# Altium PCB LedMatrixDisplay.PCBDOC (part 2 of 3)
Units mm, origin at the board's own origin, x right, y up, seen from the top; angles counter-clockwise.
Board outline 305.05 x 54.1 mm, 4 copper layers (Top Layer, POWER, GROUND, Bottom Layer); 103 components, 165 nets, 805 pads, 317 vias.
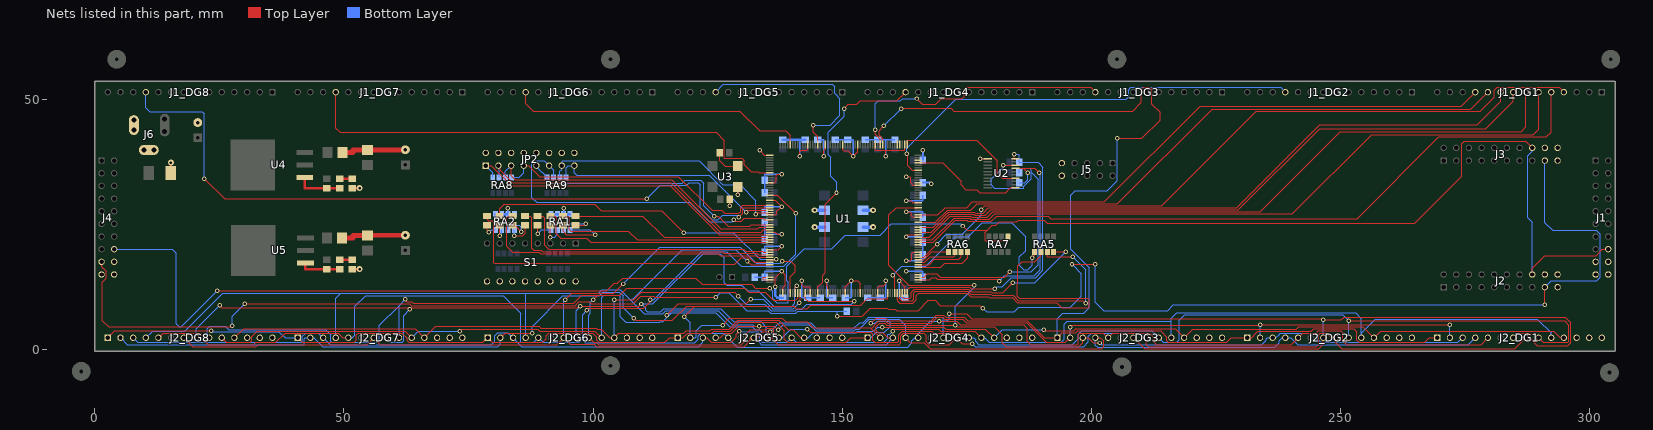
[diagram p4: the nets of this part, all layers, seen from the top]

## Via types
v1: diameter 0.9, hole 0.5, Top Layer to Bottom Layer, 307 vias
v2: diameter 1.2, hole 0.5, Top Layer to Bottom Layer, 9 vias
v3: diameter 1.27, hole 0.711, Top Layer to Bottom Layer, 1 vias

## Nets (pads, with @x,y where several pads share a name; then routed paths per layer and width w, separated by ;. In a path a pad name is that pad's centre, name@x,y a point inside that pad or via, vN(x,y) a via of type N, cw(c..) or ccw(c..) an arc to the next point about the centre after c; other vN are vias at no path point) (continued)
CNT16: J1.16 J2.16 J3.16 J4.16 RA7.1 | length 382.3
  Top Layer w0.2: v1(24.588,11.684) 102.718,11.684 104.242,13.208 104.902,13.208 105.969,14.275 120.65,14.275 121.92,13.005 131.826,13.005 132.309,12.522 132.309,12.446 132.512,12.243 v1(135.459,12.243) ; v1(174.219,24.714) 175.057,23.876 179.096,23.876 ; RA7.1@183.262,22.657 183.262,21.996 183.008,21.742 178.639,21.742 178.639,23.317 178.588,23.368 180.061,24.841 180.798,24.841 181.509,25.552 184.989,25.552 185.319,25.883 190.475,25.883 191.085,25.273 264.872,25.273 274.32,34.722 274.32,41.25 274.803,41.732 287.071,41.732 J3.16@288.417,40.386 ; J2.16@288.417,14.986 288.417,16.256 290.957,18.796 301.219,18.796 302.387,19.964 302.387,20.066 J1.16@303.657,20.066
  Bottom Layer w0.2: J4.16@3.937,20.066 15.571,20.066 16.383,19.253 16.383,5.105 16.968,4.521 17.425,4.521 v1(24.588,11.684) ; v1(135.459,12.243) 136.043,11.659 136.043,10.211 136.906,9.347 139.142,9.347 139.142,13.462 138.837,13.767 138.837,16.662 142.342,20.168 147.879,20.168 150.597,22.885 157.582,22.885 159.817,25.121 173.813,25.121 v1(174.219,24.714) ; J2.16@288.417,14.986 288.417,25.476 287.478,26.416 287.478,38.786 288.417,39.726 J3.16@288.417,40.386
CNT17: J2.17 J3.17 J4.17 R12.2 | length 382.4
  Top Layer w0.2: J4.17@1.397,17.526 1.397,16.51 1.651,16.256 1.702,16.256 2.337,15.621 2.337,14.224 1.575,13.462 1.575,5.74 2.845,4.47 27.432,4.47 v1(27.661,4.699) ; v1(30.125,9.093) 63.221,9.093 63.551,8.763 96.419,8.763 97.13,9.474 99.264,9.474 99.594,9.144 108.077,9.144 109.601,10.668 112.141,10.668 112.395,10.414 v1(124.587,10.414) ; v1(148.971,6.604) 153.999,6.604 155.65,8.255 159.073,8.255 159.327,8.001 160.655,8.001 160.909,7.747 165.227,7.747 167.259,9.779 168.656,9.779 169.672,8.763 177.673,8.763 v1(178.181,8.255) ; v1(196.088,17.018) v1(200.787,17.018) ; v1(290.957,8.89) J2.17@290.957,12.446
  Bottom Layer w0.2: v1(27.661,4.699) 27.661,6.629 v1(30.125,9.093) ; v1(124.587,10.414) 125.476,11.303 127.254,11.303 130.81,7.747 135.103,7.747 135.611,7.239 140.64,7.239 141.021,7.62 R12.2@150.942,7.62 ; v1(148.971,6.604) 148.971,7.62 ; v1(178.181,8.255) 178.943,7.493 184.531,7.493 185.42,8.382 195.707,8.382 197.993,10.668 197.993,15.113 v1(196.088,17.018) ; v1(200.787,17.018) 200.787,9.398 202.438,7.747 215.265,7.747 216.408,8.89 v1(290.957,8.89) ; J2.17@290.957,12.446 292.227,13.716 301.371,13.716 302.057,14.402 302.057,23.038 301.219,23.876 292.481,23.876 290.957,25.4 J3.17@290.957,37.846
DATA0: RA5.5 U1.99 | length 48.5
  Top Layer w0.2: v1(160.097,14.808) 160.577,14.327 U1.99@160.577,11.273 ; v1(188.113,18.351) 188.596,18.834 RA5.5@188.596,19.507
  Bottom Layer w0.2: v1(160.097,14.808) 161.951,16.662 166.726,16.662 172.67,22.606 175.286,22.606 178.08,25.4 183.961,25.4 186.767,22.594 186.767,19.768 185.497,18.498 185.497,16.815 186.411,15.9 187.212,15.9 188.113,16.801 v1(188.113,18.351)
DATA1: RA5.6 U1.100 | length 71.4
  Top Layer w0.2: U1.100@161.077,11.273 161.077,10.135 161.163,10.049 161.163,9.601 161.519,9.246 164.186,9.246 164.846,9.906 164.846,10.795 165.303,11.252 175.036,11.252 175.747,10.541 179.324,10.541 179.578,10.287 184.194,10.287 185.134,9.347 193.015,9.347 194.031,8.331 199.34,8.331 199.594,8.585 199.594,9.804 199.213,10.185 185.522,10.185 185.09,10.617 185.09,13.056 185.217,13.183 185.217,16.713 186.081,17.577 188.646,17.577 189.866,18.796 RA5.6@189.866,19.507
DATA2: RA5.7 U1.101 | length 57.6
  Top Layer w0.2: U1.101@161.577,11.273 161.577,10.084 161.933,9.728 164.008,9.728 164.338,10.058 164.338,11.303 164.687,11.652 175.202,11.652 175.805,11.049 179.8,11.049 180.054,10.795 184.252,10.795 185.293,9.754 198.247,9.754 v1(198.832,9.169) ; RA5.7@191.136,19.507 191.136,18.593 v1(196.215,18.593)
  Bottom Layer w0.2: v1(196.215,18.593) 198.832,15.977 v1(198.832,9.169)
DATA3: RA5.8 U1.102 | length 41.1
  Top Layer w0.2: U1.102@162.077,11.273 162.077,10.414 162.306,10.185 163.551,10.185 163.803,10.438 163.803,11.403 164.452,12.052 175.367,12.052 175.863,11.557 179.858,11.557 180.086,11.328 182.195,11.328 v1(184.176,13.31) ; RA5.8@192.406,19.507 v1(194.818,19.507)
  Bottom Layer w0.2: v1(184.176,13.31) 188.621,13.31 v1(194.818,19.507)
DATA4: RA6.5 U1.114 | length 6.8
  Top Layer w0.2: U1.114@165.227,17.923 166.387,17.923 167.971,19.507 RA6.5@171.324,19.507
DATA5: RA6.6 U1.113 | length 8.7
  Top Layer w0.2: U1.113@165.227,17.423 166.522,17.423 167.64,18.542 172.391,18.542 172.594,18.745 RA6.6@172.594,19.507
DATA6: RA6.7 U1.112 | length 10.3
  Top Layer w0.2: U1.112@165.227,16.923 167.412,16.923 168.497,18.009 173.33,18.009 173.864,18.542 RA6.7@173.864,19.507
DATA7: RA6.8 U1.111 | length 11.9
  Top Layer w0.2: U1.111@165.227,16.423 169.749,16.423 170.597,17.272 174.067,17.272 175.134,18.339 RA6.8@175.134,19.507
DIN: U1.153 U2.1 | length 22.8
  Top Layer w0.2: U1.153@165.227,37.423 170.12,37.423 173.845,33.699 173.845,32.969 174.785,32.029 177.013,32.029 177.623,31.42 182.753,31.42 183.711,32.377 U2.1@184.758,32.377
DONE: R4.2 U1.104 U2.10 | length 59.2
  Top Layer w0.2: U1.104@163.077,11.273 163.077,11.938 163.592,12.452 175.533,12.452 175.895,12.09 v1(180.62,12.09) ; v1(184.481,39.065) 184.481,38.227 U2.10@184.758,38.227
  Bottom Layer w0.2: v1(180.62,12.09) 181.026,12.497 182.068,12.497 183.896,14.326 188.773,14.326 190.246,15.799 190.246,36.525 189.307,37.465 R4.2@185.481,37.465 185.481,38.862 185.278,39.065 v1(184.481,39.065)
ENABLE0: J1_DG1.11 U1.132 | length 122
  Top Layer w0.2: U1.132@165.227,26.923 169.164,26.923 170.638,28.397 174.93,28.397 176.073,29.54 202.565,29.54 221.793,48.768 274.193,48.768 J1_DG1.11@276.987,51.562
ENABLE1: J1_DG2.11 U1.150 | length 88.3
  Top Layer w0.2: v1(162.941,39.218) 163.17,38.989 163.17,36.805 164.051,35.923 U1.150@165.227,35.923
  Bottom Layer w0.2: v1(162.941,39.218) 162.941,40.335 172.797,50.19 207.01,50.19 207.468,50.648 207.468,52.07 207.899,52.502 237.948,52.502 J1_DG2.11@238.887,51.562
ENABLE2: J1_DG3.11 U1.168 | length 56.3
  Top Layer w0.2: v1(156.591,44.018) 156.591,43.15 157.577,42.164 U1.168@157.577,41.073 ; v1(164.897,50.292) 166.091,49.098 168.733,49.098 169.85,50.216 174.016,50.216 174.448,50.648 174.448,52.07 174.879,52.502 199.848,52.502 J1_DG3.11@200.787,51.562
  Bottom Layer w0.2: v1(156.591,44.018) 156.591,49.251 157.201,49.86 161.671,49.86 162.103,50.292 v1(164.897,50.292)
ENABLE3: J1_DG4.11 U1.68 | length 54.2
  Top Layer w0.2: U1.68@145.077,11.273 145.077,12.489 146.05,13.462 146.05,14.859 146.558,15.367 146.558,29.083 v1(148.844,31.369) ; v1(150.368,48.26) 151.206,49.098 152.908,49.098 153.645,49.835 160.96,49.835 J1_DG4.11@162.687,51.562
  Bottom Layer w0.2: v1(148.844,31.369) 148.844,33.528 147.701,34.671 147.701,38.481 147.193,38.989 147.193,43.561 150.368,46.736 v1(150.368,48.26)
ENABLE4: J1_DG5.11 U1.193 | length 41.3
  Top Layer w0.2: v1(144.145,44.958) 144.145,43.561 145.077,42.629 U1.193@145.077,41.073
  Bottom Layer w0.2: J1_DG5.11@124.587,51.562 126.137,53.111 148.006,53.111 148.463,52.654 148.463,51.308 149.505,50.267 149.505,46.889 147.574,44.958 v1(144.145,44.958)
ENABLE5: J1_DG6.11 U1.204 | length 59.9
  Top Layer w0.2: J1_DG6.11@86.487,51.562 86.487,49.225 87.961,47.752 129.464,47.752 133.408,43.808 138.695,43.808 139.577,42.926 U1.204@139.577,41.073
ENABLE6: J1_DG7.11 U1.8 | length 100.5
  Top Layer w0.2: J1_DG7.11@48.387,51.562 48.387,44.348 49.251,43.485 124.74,43.485 126.365,41.859 126.365,38.303 129.896,38.303 130.353,37.846 130.353,37.008 131.75,35.611 133.188,35.611 133.376,35.423 U1.8@135.427,35.423
ENABLE7: J1_DG8.11 U1.22 | length 152.5
  Top Layer w0.2: v1(22.022,34.214) 26.086,30.15 110.77,30.15 v1(110.821,30.201) ; v1(129.236,26.467) 129.998,27.229 129.998,28.27 130.151,28.423 U1.22@135.427,28.423
  Bottom Layer w0.2: J1_DG8.11@10.287,51.562 10.287,48.412 11.1,47.6 21.616,47.6 22.022,47.193 v1(22.022,34.214) ; v1(110.821,30.201) 113.462,32.842 118.771,32.842 119.304,33.376 121.108,33.376 121.514,32.969 121.514,28.372 123.952,25.933 125.07,25.933 125.984,26.848 128.855,26.848 v1(129.236,26.467)
FPGA_C\S\: U1.160
FPGA_D1: U1.145
FPGA_D4: U1.126
FPGA_D5: U1.120
FPGA_D6: U1.116
FPGA_D7: U1.108
"FPGA_DOUT_ BUSY": U1.154
FPGA_TDO-TDI: U1.157 U2.4 | length 27.2
  Top Layer w0.2: U1.157@163.077,41.073 163.077,41.961 176.962,41.961 181.077,37.846 181.077,35.394 182.144,34.327 U2.4@184.758,34.327
FPGA_W\R\I\T\E\: U1.161
GND: C1.2 C2.2 C3.2 C4.2 C5.1 C6.1 C7.1 C8.1 C9.1 C10.1 C11.1 C12.1 C13.1 C14.1 C15.1 C16.1 C17.1 C18.1 C19.2 C20.2 C21.2 C22.2 C23.2 C24.2 C25.2 C26.2 C27.2 C28.2 C29.2 C30.2 C31.2 C32.2 C34.1 C35.1 C36.1 C37.2 C38.2 C39.2 C40.2 C41.2 C42.2 C43.2 C44.2 D1.1 J1.17 J1.18 J1.19 J1.20 J2.18 J2.19 J2.20 J2_DG1.12 J2_DG1.13 J2_DG1.14 J2_DG2.12 J2_DG2.13 J2_DG2.14 J2_DG3.12 J2_DG3.13 J2_DG3.14 J2_DG4.12 J2_DG4.13 J2_DG4.14 J2_DG5.12 J2_DG5.13 J2_DG5.14 J2_DG6.12 J2_DG6.13 J2_DG6.14 J2_DG7.12 J2_DG7.13 J2_DG7.14 J2_DG8.12 J2_DG8.13 J2_DG8.14 J3.18 J3.19 J3.20 J4.18 J4.19 J4.20 J5.9 J5.10 J6.2 J6.2A J6.2B J6.3 J6.3A J6.3B JP2.2 JP2.4 JP2.6 JP2.8 JP2.10 JP2.12 JP2.14 JP2.16 R1.1 R9.1 R11.2 RA1.5 RA1.6 RA1.7 RA1.8 RA2.5 RA2.6 RA2.7 RA2.8 S1.9 S1.10 S1.11 S1.12 S1.13 S1.14 S1.15 S1.16 U1.1 U1.12 U1.19 U1.25 U1.32 U1.39 U1.50 U1.51 U1.54 U1.65 U1.72 U1.79 U1.85 U1.92 U1.103 U1.117 U1.124 U1.131 U1.137 U1.144 U1.158 U1.170 U1.177 U1.183 U1.190 U1.197 U2.11 U3.2 | length 260.8
  Top Layer w0.2: v1(133.411,39.878) 134.366,38.923 U1.1@135.427,38.923 ; U1.50@135.427,14.423 134.112,14.423 134.112,13.923 U1.51@135.427,13.923 136.479,13.923 136.602,14.046 ; U1.39@135.427,19.923 137.158,19.923 v1(137.84,20.606) ; U1.32@135.427,23.423 136.597,23.423 136.914,23.106 v1(137.84,23.106) ; U1.25@135.427,26.923 136.652,26.923 136.906,27.178 136.906,27.672 v1(137.84,28.606) 136.523,29.923 U1.19@135.427,29.923 ; U1.12@135.427,33.423 136.421,33.423 136.779,33.782 136.779,34.925 136.96,35.106 v1(137.84,35.106) ; v1(136.602,12.497) 136.602,14.046 ; 137.5,15.265 136.602,14.367 136.602,14.046 ; v1(137.84,15.606) 138.608,14.838 138.608,12.802 138.077,12.271 U1.54@138.077,11.273 ; v1(141.439,38.674) 141.439,39.584 141.732,39.878 142.875,39.878 143.077,40.08 U1.197@143.077,41.073 ; v1(141.895,13.686) 141.895,12.919 142.24,12.573 143.383,12.573 143.577,12.379 U1.65@143.577,11.273 ; v1(146.26,38.66) 146.26,39.834 146.577,40.151 U1.190@146.577,41.073 ; v1(146.895,13.686) 146.895,12.745 147.077,12.562 U1.72@147.077,11.273 ; U1.183@150.077,41.073 150.077,40.042 150.338,39.781 151.079,39.781 v1(152.186,38.674) 153.077,39.565 U1.177@153.077,41.073 ; U1.79@150.577,11.273 150.577,12.504 v1(151.76,13.686) 153.065,13.686 153.577,13.174 U1.85@153.577,11.273 ; U1.170@156.577,41.073 156.577,39.878 158.75,39.878 ; U1.92@157.077,11.273 157.077,12.297 157.48,12.7 158.369,12.7 158.75,13.081 v1(158.75,13.718) ; v1(158.75,38.66) 158.75,39.878 ; v1(161.395,13.686) 162.577,12.504 U1.103@162.577,11.273 ; U1.158@162.577,41.073 162.577,39.878 158.75,39.878 ; v1(162.814,17.741) 163.664,17.741 163.957,18.034 163.957,19.177 164.204,19.423 U1.117@165.227,19.423 ; v1(162.814,22.606) 163.132,22.923 U1.124@165.227,22.923 ; v1(162.814,27.606) 163.529,27.606 163.83,27.305 163.83,26.797 164.204,26.423 U1.131@165.227,26.423 ; v1(162.814,29.741) 163.808,29.741 164.125,29.423 U1.137@165.227,29.423 ; v1(162.814,34.606) 163.514,34.606 163.703,34.417 163.703,33.401 164.181,32.923 U1.144@165.227,32.923 ; v1(177.673,38.227) U2.11@179.208,38.227
  Top Layer w0.3: v1(127.442,28.772) C37.2@127.442,30.099 ; v1(129.032,30.954) U3.2@129.032,32.531
  Top Layer w0.5: D1.1@15.304,35.306 v2(15.304,37.43) ; R11.2@51.689,16.068 v2(53.166,16.068) ; R9.1@51.689,32.324 v2(53.166,32.324) ; C42.2@62.206,40.005 C42.2@62.23,39.981 ; C44.2@62.357,22.812 C44.2@62.357,22.86
  Top Layer w1: C40.2@49.609,22.352 51.816,22.352 51.816,22.812 C41.2@54.737,22.812 54.737,22.86 C44.2@62.357,22.86 ; C38.2@49.76,39.497 51.816,39.497 51.816,39.957 C39.2@54.737,39.957 62.357,39.957 C42.2@62.357,40.005
  Bottom Layer w0.254: RA2.7@82.931,27.102 v1(82.931,28.279) ; RA1.7@94.107,27.102 v1(94.107,28.279)
  Bottom Layer w0.3: R1.1@132.445,14.423 C34.1@134.477,14.423 134.477,15.606 v1(137.84,15.606) ; C22.2@134.477,19.423 134.477,20.606 v1(137.84,20.606) ; C29.2@134.477,21.923 134.477,23.106 v1(137.84,23.106) ; C28.2@134.477,25.423 134.493,23.114 ; C21.2@134.477,27.423 134.477,28.606 v1(137.84,28.606) ; C27.2@134.477,31.423 C20.2@134.477,33.923 134.477,35.106 v1(137.84,35.106) ; v1(141.439,38.674) 141.439,42.023 ; v1(141.895,13.686) 141.895,10.323 C25.2@143.077,10.323 C32.2@145.577,10.323 ; C7.1@142.577,42.037 C7.1@142.621,42.037 ; C15.1@145.077,42.023 146.26,42.023 v1(146.26,38.66) ; v1(146.895,13.686) 146.895,10.323 C35.1@148.077,10.323 ; C14.1@148.577,42.023 C6.1@151.077,42.023 ; C24.2@150.577,10.323 151.76,10.323 v1(151.76,13.686) ; C6.1@151.003,42.037 151.077,42.037 152.186,42.037 v1(152.186,38.674) ; C13.1@154.577,42.023 C5.1@157.077,42.023 158.75,42.023 ; C31.2@155.077,10.323 C23.2@157.577,10.323 157.567,10.355 157.577,10.355 158.75,10.355 v1(158.75,13.718) ; v1(158.75,38.66) 158.75,42.023 ; C9.1@160.577,42.023 158.75,42.023 ; v1(161.395,13.686) 161.395,10.323 C36.1@162.577,10.323 ; v1(162.814,15.606) 166.177,15.606 C19.2@166.177,14.423 ; v1(162.814,17.741) 166.177,17.741 C12.1@166.177,18.923 C18.1@166.177,21.423 ; v1(162.814,22.606) 166.177,22.606 C17.1@166.177,23.923 ; v1(162.814,27.606) 166.177,27.606 C11.1@166.177,26.423 ; v1(162.814,29.741) 166.177,29.741 C16.1@166.177,30.923
  Bottom Layer w0.4: C10.1@166.177,33.423 167.618,33.423 v1(167.894,33.147) ; C30.2@166.177,37.923 v1(166.177,39.878)
  Bottom Layer w0.5: RA2.5@80.391,27.102 RA2.6@81.661,27.102 RA2.7@82.931,27.102 RA2.8@84.201,27.102 ; RA1.5@91.567,27.102 RA1.6@92.837,27.102 RA1.7@94.107,27.102 RA1.8@95.377,27.102 ; v1(136.602,12.497) 136.602,10.718 136.997,10.323 C26.2@138.077,10.323 ; C8.1@138.077,42.023 141.439,42.023 C7.1@142.577,42.023
  Bottom Layer w0.7: v2(144.444,24.473) C3.2@146.477,24.473 ; v2(144.444,27.873) C2.2@146.477,27.873 ; C4.2@154.177,24.473 v2(156.21,24.473) ; C1.2@154.177,27.873 v2(156.21,27.873)
GREEN0: J2_DG1.1 J2_DG2.1 J2_DG3.1 J2_DG4.1 J2_DG5.1 J2_DG6.1 J2_DG7.1 J2_DG8.1 U1.167 | length 431.6
  Top Layer w0.2: J2_DG8.1@2.667,2.286 4.039,3.658 v1(23.419,3.658) ; J2_DG7.1@40.767,2.286 41.707,1.346 52.096,1.346 52.528,1.778 52.528,2.896 52.858,3.226 61.646,3.226 62.688,2.184 62.688,1.676 63.018,1.346 77.928,1.346 J2_DG6.1@78.867,2.286 79.807,1.346 89.891,1.346 90.628,2.083 90.628,2.743 91.11,3.226 99.949,3.226 100.788,2.388 100.788,1.829 101.27,1.346 114.427,1.346 115.367,2.286 J2_DG5.1@116.967,2.286 118.034,2.286 118.974,3.226 123.851,3.226 124.257,3.632 127.508,3.632 129.25,5.373 136.74,5.373 138.405,3.708 138.405,2.007 139.065,1.346 150.8,1.346 151.74,2.286 J2_DG4.1@155.067,2.286 ; v1(155.728,5.182) 156.769,6.223 158.75,6.223 159.258,5.715 167.811,5.715 168.903,6.807 170.383,6.807 170.815,6.375 174.473,6.375 175.159,5.69 187.154,5.69 190.558,2.286 J2_DG3.1@193.167,2.286 194.158,3.277 196.876,3.277 197.257,3.658 213.843,3.658 215.088,2.413 215.088,1.676 215.418,1.346 227.127,1.346 228.067,2.286 J2_DG2.1@231.267,2.286 232.131,2.286 232.537,2.692 232.537,2.819 233.35,3.632 244.094,3.632 244.552,4.089 252.629,4.089 253.188,3.531 253.188,1.829 253.67,1.346 266.827,1.346 267.767,2.286 J2_DG1.1@269.367,2.286 ; U1.167@158.077,41.073 158.077,42.266 157.404,42.939 157.404,43.815 v1(158.369,44.78) ; v1(161.798,48.209) 161.882,48.292 171.817,48.292 172.358,47.752 208.23,47.752 210.008,49.53 210.008,52.07 210.439,52.502 211.659,52.502 212.09,52.07 212.09,49.174 213.741,47.523 213.741,45.974 210.084,42.316 v1(205.156,42.316)
  Bottom Layer w0.2: v1(23.419,3.658) 23.546,3.531 36.983,3.531 38.227,2.286 J2_DG7.1@40.767,2.286 ; J2_DG4.1@155.067,2.286 155.728,2.286 156.795,3.353 158.471,3.353 159.639,4.521 159.639,5.334 159.385,5.588 156.972,5.588 156.566,5.182 v1(155.728,5.182) ; v1(158.369,44.78) v1(161.798,48.209) ; J2_DG3.1@193.167,2.286 193.167,6.147 194.183,7.163 198.4,7.163 199.594,8.357 199.594,16.358 195.86,20.091 195.86,30.836 196.774,31.75 203.124,31.75 205.156,33.782 v1(205.156,42.316)
GREEN1: J2_DG1.2 J2_DG2.2 J2_DG3.2 J2_DG4.2 J2_DG5.2 J2_DG6.2 J2_DG7.2 J2_DG8.2 U1.96 | length 346.9
  Top Layer w0.2: J2_DG6.2@81.407,2.286 82.347,3.226 v1(87.783,3.226) ; v1(108.128,6.172) 108.535,5.766 115.926,5.766 118.771,8.611 140.234,8.611 140.767,8.077 143.002,8.077 143.714,8.788 153.695,8.788 155.013,10.106 159.077,10.106 U1.96@159.077,11.273 ; v1(118.314,6.502) 120.422,8.611 ; v1(125.984,4.801) 127.357,6.173 137.999,6.173 138.686,5.486 143.002,5.486 144.221,4.267 155.626,4.267 J2_DG4.2@157.607,2.286 ; 155.769,4.124 155.769,4.131 157.353,5.715 158.623,5.715 159.112,5.226 167.888,5.226 169.037,6.375 170.155,6.375 170.561,5.969 174.219,5.969 174.905,5.283 186.97,5.283 190.907,1.346 194.768,1.346 J2_DG3.2@195.707,2.286 ; v1(195.707,4.445) 196.114,4.851 233.757,4.851 v1(233.807,4.902) v1(271.907,4.902)
  Bottom Layer w0.2: J2_DG8.2@5.207,2.286 6.554,0.94 42.114,0.94 42.114,2.083 42.317,2.286 J2_DG7.2@43.307,2.286 43.968,2.286 45.771,0.483 80.874,0.483 81.407,1.016 J2_DG6.2@81.407,2.286 ; v1(87.783,3.226) 87.783,4.521 93.955,10.693 101.244,10.693 101.981,11.43 105.283,11.43 106.02,10.693 106.02,8.28 v1(108.128,6.172) ; v1(118.314,6.502) 119.507,5.309 J2_DG5.2@119.507,2.286 120.473,2.286 120.676,2.489 120.676,3.708 121.768,4.801 v1(125.984,4.801) ; J2_DG3.2@195.707,2.286 v1(195.707,4.445) ; J2_DG2.2@233.807,2.286 v1(233.807,4.902) ; J2_DG1.2@271.907,2.286 v1(271.907,4.902)
GREEN2: J2_DG1.3 J2_DG2.3 J2_DG3.3 J2_DG4.3 J2_DG5.3 J2_DG6.3 J2_DG7.3 J2_DG8.3 U1.135 | length 339.2
  Top Layer w0.2: J2_DG5.3@122.047,2.286 122.809,2.286 123.749,1.346 127.686,1.346 128.728,2.388 128.728,2.997 v1(129.286,3.556) ; J2_DG4.3@160.147,2.286 159.131,2.286 158.115,3.302 157.226,3.302 156.718,3.81 156.718,4.445 157.48,5.207 158.496,5.207 158.877,4.826 172.619,4.826 172.974,4.47 180.518,4.47 182.068,2.921 182.068,1.27 182.88,0.457 197.435,0.457 198.247,1.27 J2_DG3.3@198.247,2.286 199.314,2.286 200.356,1.245 v1(201.676,1.245) ; U1.135@165.227,28.423 160.834,28.423 159.335,26.924 159.335,16.84 163.322,12.852 v1(176.454,12.852)
  Bottom Layer w0.2: J2_DG8.3@7.747,2.286 8.687,1.346 41.707,1.346 41.707,2.591 42.342,3.226 44.908,3.226 47.244,0.889 79.629,0.889 80.264,1.524 80.264,2.667 80.899,3.302 82.931,3.302 85.7,0.533 121.184,0.533 122.047,1.397 J2_DG5.3@122.047,2.286 ; v1(129.286,3.556) 129.388,3.454 133.071,3.454 133.401,3.124 133.401,1.27 133.731,0.94 158.801,0.94 J2_DG4.3@160.147,2.286 ; v1(172.644,4.801) 172.644,8.636 176.454,12.446 v1(176.454,12.852) ; v1(201.676,1.245) 202.032,0.889 234.163,0.889 235.077,1.803 235.077,2.083 235.281,2.286 J2_DG2.3@236.347,2.286 237.008,2.286 237.617,2.896 237.617,3.023 237.821,3.226 244.907,3.226 245.237,2.896 245.237,2.057 245.949,1.346 273.508,1.346 J2_DG1.3@274.447,2.286
GREEN3: J2_DG1.4 J2_DG2.4 J2_DG3.4 J2_DG4.4 J2_DG5.4 J2_DG6.4 J2_DG7.4 J2_DG8.4 U1.45 | length 350.6
  Top Layer w0.2: J2_DG5.4@124.587,2.286 125.527,2.286 126.467,3.226 127.813,3.226 129.21,4.623 136.398,4.623 v1(137.135,3.886) ; v1(130.988,17.628) 131.692,16.923 U1.45@135.427,16.923 ; J2_DG4.4@162.687,2.286 163.653,1.321 166.421,1.321 167.691,0.051 202.032,0.051 202.438,0.457 202.438,1.651 201.803,2.286 J2_DG3.4@200.787,2.286
  Bottom Layer w0.2: J2_DG8.4@10.287,2.286 11.634,3.632 18.111,3.632 25.731,11.252 101.124,11.252 101.785,11.913 105.436,11.913 110.262,7.087 113.97,7.087 114.58,7.696 125.146,7.696 127.889,4.953 132.011,4.953 132.341,4.623 v1(133.3,4.623) ; J2_DG7.4@48.387,2.286 48.387,10.211 49.429,11.252 ; J2_DG6.4@86.487,2.286 86.487,11.252 ; 107.341,10.008 107.976,10.008 117.933,19.964 128.651,19.964 v1(130.988,17.628) ; v1(137.135,3.886) 138.202,4.953 143.383,4.953 144.634,3.702 152.419,3.702 152.673,3.956 153.41,3.956 154.942,5.488 155.448,5.994 161.443,5.994 162.687,4.75 J2_DG4.4@162.687,2.286 ; J2_DG3.4@200.787,2.286 200.787,0.838 201.245,0.381 236.728,0.381 237.617,1.27 237.617,1.676 238.227,2.286 J2_DG2.4@238.887,2.286 239.954,2.286 241.377,0.864 275.565,0.864 J2_DG1.4@276.987,2.286
GREEN4: J2_DG1.5 J2_DG2.5 J2_DG3.5 J2_DG4.5 J2_DG5.5 J2_DG6.5 J2_DG7.5 J2_DG8.5 U1.17 | length 372.3
  Top Layer w0.2: J2_DG8.5@12.827,2.286 13.767,3.226 21.209,3.226 22.048,2.388 22.048,1.676 22.784,0.94 31.954,0.94 32.36,1.346 36.399,1.346 38.278,3.226 48.845,3.226 49.784,2.286 J2_DG7.5@50.927,2.286 ; v1(98.73,7.772) 99.137,8.179 110.135,8.179 111.456,9.5 v1(111.456,9.881) ; U1.17@135.427,30.923 136.971,30.923 v1(140.64,27.254) ; v1@169.418,5.563 172.949,5.563 173.635,4.877 186.36,4.877 187.148,4.089 187.148,1.575 187.833,0.889 197.13,0.889 197.308,1.067 197.308,2.946 197.587,3.226 202.388,3.226 J2_DG3.5@203.327,2.286 204.267,3.226 211.659,3.226 212.548,2.337 212.548,1.397 213.03,0.914 240.056,0.914 242.367,3.226 245.085,3.226 245.517,3.658 250.038,3.658 250.419,3.277 250.419,1.727 251.232,0.914 278.156,0.914 J2_DG1.5@279.527,2.286
  Bottom Layer w0.2: J2_DG7.5@50.927,2.286 51.689,2.286 52.197,2.794 52.197,8.585 54.356,10.744 81.992,10.744 85.548,7.188 85.548,1.422 85.624,1.346 88.088,1.346 J2_DG6.5@89.027,2.286 89.967,1.346 97.206,1.346 97.917,2.057 97.917,6.96 v1(98.73,7.772) ; 97.79,1.93 98.425,1.295 120.371,1.295 121.082,2.007 121.082,2.718 121.59,3.226 126.188,3.226 128.982,0.432 163.119,0.432 163.957,1.27 163.957,1.676 164.567,2.286 J2_DG4.5@165.227,2.286 165.227,3.124 167.691,5.588 v1(169.418,5.588) ; v1(111.456,9.881) 112.167,9.881 121.844,19.558 126.873,19.558 129.744,16.688 138.278,16.688 140.64,19.05 v1(140.64,27.254)
INIT: R3.2 U1.107 U2.8 | length 66.8
  Top Layer w0.2: U1.107@165.227,14.423 166.421,14.423 167.085,15.088 168.987,15.088 169.647,14.427 182.576,14.427 v1(183.642,15.494) ; v1(182.271,36.927) U2.8@184.758,36.927
  Bottom Layer w0.2: v1(182.271,36.927) 182.271,36.474 179.858,34.061 179.858,32.969 180.493,32.334 186.436,32.334 186.436,32.664 187.96,34.188 187.96,35.458 ; v1(183.642,15.494) 187.91,15.494 189.357,16.942 189.357,34.061 187.96,35.458 ; R3.2@185.481,35.433 185.481,36.271 187.63,36.271 187.96,35.941 187.96,35.458
JUMPERS0: JP2.1 RA8.1 U1.33 | length 65.6
  Top Layer w0.2: JP2.1@78.487,36.83 79.604,36.83 83.693,32.741 115.469,32.741 125.286,22.923 U1.33@135.427,22.923
  Bottom Layer w0.2: JP2.1@78.487,36.83 79.883,35.433 RA8.1@79.883,34.468
JUMPERS1: JP2.3 RA8.2 U1.31 | length 63.1
  Top Layer w0.2: JP2.3@81.027,36.83 81.382,36.83 81.382,35.89 83.897,33.376 115.621,33.376 125.502,23.495 133.709,23.495 134.138,23.923 U1.31@135.427,23.923
  Bottom Layer w0.2: JP2.3@81.027,36.83 81.153,36.83 RA8.2@81.153,34.468
JUMPERS2: JP2.5 RA8.3 U1.30 | length 61.2
  Top Layer w0.2: JP2.5@83.567,36.83 83.567,34.823 84.379,34.011 115.748,34.011 125.603,24.155 133.057,24.155 133.325,24.423 U1.30@135.427,24.423
  Bottom Layer w0.2: RA8.3@82.423,34.468 82.423,35.687 JP2.5@83.567,36.83
JUMPERS3: JP2.7 RA8.4 U1.21 | length 58.7
  Top Layer w0.2: JP2.7@86.107,36.83 87.097,36.83 89.307,34.62 117.145,34.62 123.902,27.864 125.807,27.864 126.442,27.229 129.21,27.229 129.591,27.61 129.591,28.499 130.016,28.923 U1.21@135.427,28.923
  Bottom Layer w0.2: RA8.4@83.693,34.468 85.167,34.468 86.107,35.408 JP2.7@86.107,36.83
JUMPERS4: JP2.9 RA9.1 U1.29 | length 55.6
  Top Layer w0.2: v1(124.283,26.695) 125.121,26.695 127.153,24.663 131.465,24.663 131.725,24.923 U1.29@135.427,24.923
  Bottom Layer w0.2: JP2.9@88.647,36.83 88.647,36.626 RA9.1@90.805,34.468 90.805,33.782 91.263,33.325 117.856,33.325 118.44,33.909 121.59,33.909 122.225,33.274 122.225,28.753 v1(124.283,26.695)
JUMPERS5: JP2.11 RA9.2 U1.27 | length 64.1
  Top Layer w0.2: v1(128.27,25.933) 128.524,25.679 129.718,25.679 130.302,26.264 134.036,26.264 134.376,25.923 U1.27@135.427,25.923
  Bottom Layer w0.2: RA9.2@92.075,34.468 92.075,35.941 90.247,37.77 88.037,37.77 87.707,37.44 87.707,30.404 88.672,29.439 119.355,29.439 123.267,25.527 127.94,25.527 v1@128.27,25.857
JUMPERS6: JP2.13 RA9.3 U1.24 | length 51.3
  Top Layer w0.2: v1(132.69,27.026) 133.088,27.423 U1.24@135.427,27.423
  Bottom Layer w0.2: RA9.3@93.345,34.468 93.345,35.662 93.727,36.043 JP2.13@93.727,36.83 93.727,37.541 93.955,37.77 121.285,37.77 126.035,33.02 129.49,33.02 132.69,29.82 v1(132.69,27.026)
JUMPERS7: JP2.15 RA9.4 U1.23 | length 47.8
  Top Layer w0.2: v1(130.76,27.508) 131.175,27.923 U1.23@135.427,27.923
  Bottom Layer w0.2: RA9.4@94.615,34.468 94.615,36.449 94.996,36.83 JP2.15@96.267,36.83 96.267,35.408 96.749,34.925 123.343,34.925 v1(130.76,27.508)
LED0: LED1.1 U1.35 | length 44.9
  Top Layer w0.2: LED1.1@93.98,26.721 95.022,26.721 95.276,26.467 95.276,24.003 95.581,23.698 107.061,23.698 108.836,21.923 U1.35@135.427,21.923
LED0#: LED1.2 RA1.1 | length 13.4
  Top Layer w0.2: LED1.2@93.98,24.821 93.98,23.622 94.666,22.936 v1(100.407,22.936)
  Bottom Layer w0.2: RA1.1@95.377,23.952 99.391,23.952 v1(100.407,22.936)
LED1: LED2.1 U1.34 | length 40.7
  Top Layer w0.2: LED2.1@96.52,26.721 109.978,26.721 114.275,22.423 U1.34@135.427,22.423
LED1#: LED2.2 RA1.2 | length 7.6
  Top Layer w0.2: LED2.2@96.52,24.821 98.176,24.821 v1(98.502,25.146)
  Bottom Layer w0.2: RA1.2@94.107,23.952 94.107,24.892 94.361,25.146 v1(98.502,25.146)
LED2: LED3.1 U1.36 | length 48.1
  Top Layer w0.2: LED3.1@91.44,26.721 92.38,26.721 92.634,26.467 92.634,23.139 93.549,22.225 98.781,22.225 99.583,21.423 U1.36@135.427,21.423
LED2#: LED3.2 RA1.3 | length 4.9
  Top Layer w0.2: v1(91.44,22.504) LED3.2@91.44,24.821
  Bottom Layer w0.2: v1(91.44,22.504) 92.329,22.504 92.837,23.012 RA1.3@92.837,23.952
LED3: LED4.1 U1.40 | length 52.7
  Top Layer w0.2: LED4.1@88.9,26.721 89.891,26.721 90.297,26.314 90.297,20.853 91.11,20.041 130.252,20.041 130.683,19.609 134.011,19.609 134.196,19.423 U1.40@135.427,19.423
LED3#: LED4.2 RA1.4 | length 4.7
  Top Layer w0.2: v1(88.9,23.114) LED4.2@88.9,24.821
  Bottom Layer w0.2: v1(88.9,23.114) 89.739,23.952 RA1.4@91.567,23.952
LED4: LED5.1 U1.41 | length 56
  Top Layer w0.2: LED5.1@86.36,26.721 87.453,26.721 87.681,26.492 87.681,20.218 88.062,19.837 89.586,19.837 89.866,19.558 125.883,19.558 126.238,19.202 132.893,19.202 133.172,18.923 U1.41@135.427,18.923
LED4#: LED5.2 RA2.1 | length 5.1
  Top Layer w0.2: v1(84.201,22.758) 85.903,22.758 86.36,23.216 LED5.2@86.36,24.821
  Bottom Layer w0.2: v1(84.201,22.758) RA2.1@84.201,23.952
LED5: LED6.1 U1.42 | length 60.7
  Top Layer w0.2: LED6.1@83.82,26.721 82.957,26.721 82.703,26.467 82.703,20.625 83.897,19.431 89.231,19.431 89.51,19.152 125.121,19.152 125.476,18.796 132.639,18.796 133.012,18.423 U1.42@135.427,18.423
LED5#: LED6.2 RA2.2 | length 6.9
  Top Layer w0.2: LED6.2@83.82,24.821 84.298,24.821 v1(85.598,23.52)
  Bottom Layer w0.2: RA2.2@82.931,23.952 82.931,24.638 83.16,24.867 85.167,24.867 85.598,24.435 v1(85.598,23.52)
LED6: LED7.1 U1.43 | length 63.4
  Top Layer w0.2: LED7.1@81.28,26.721 81.28,28.194 82.169,29.083 100.305,29.083 101.626,27.762 113.818,27.762 v1(118.212,23.368) ; U1.43@135.427,17.923 136.72,17.923 v1(136.805,18.009)
  Bottom Layer w0.2: v1(118.212,23.368) 128.169,23.368 133.528,18.009 v1(136.805,18.009)
LED6#: LED7.2 RA2.3 | length 3.4
  Top Layer w0.2: v1(81.28,22.758) LED7.2@81.28,24.821
  Bottom Layer w0.2: v1(81.28,22.758) 81.661,23.139 RA2.3@81.661,23.952
LED7: LED8.1 U1.44 | length 66.8
  Top Layer w0.2: LED8.1@78.74,26.721 78.74,26.06 79.02,25.781 79.756,25.781 80.087,25.451 80.087,17.374 80.239,17.221 119.863,17.221 120.041,17.043 128.423,17.043 129.769,18.39 131.369,18.39 132.335,17.423 U1.44@135.427,17.423
LED7#: LED8.2 RA2.4 | length 3.1
  Top Layer w0.2: LED8.2@78.74,24.821 78.74,23.8 v1(79.121,23.419)
  Bottom Layer w0.2: v1(79.121,23.419) 79.655,23.952 RA2.4@80.391,23.952
NetR5_1: R5.1 U3.3 | length 5.6
  Top Layer w0.2: R5.1@125.415,39.37 125.415,37.846 126.53,36.731 U3.3@129.032,36.731
NetR6_2: R6.2 R8.1 U4.1 | length 9.1
  Top Layer w0.5: U4.1@42.164,34.417 42.164,32.324 R6.2@46.609,32.324 R8.1@49.149,32.324
NetR7_2: R7.2 R10.1 U5.1 | length 8.1
  Top Layer w0.5: U5.1@42.291,17.272 42.291,16.068 R7.2@46.609,16.068 R10.1@49.149,16.068
NetR8_2: R8.2 R9.2 | length 2.5
  Top Layer w0.5: R8.2@49.149,34.224 R9.2@51.689,34.224
NetR10_2: R10.2 R11.1 | length 2.7
  Top Layer w0.5: R10.2@49.149,17.968 R11.1@51.689,17.968 R11.1@51.816,17.968
PROGRAM: R2.2 U1.106 U2.7 | length 55.2
  Top Layer w0.2: U1.106@165.227,13.923 167.543,13.923 167.996,14.376 168.707,14.376 169.063,14.021 181.102,14.021 v1(181.458,13.665) ; U2.7@184.758,36.277 186.304,36.277 ; v1(187.198,35.382) 186.304,36.277 ; v1(189.484,35.382) 188.59,36.277 186.304,36.277
  Bottom Layer w0.2: v1(181.458,13.665) 182.525,14.732 188.545,14.732 189.764,15.951 189.764,35.103 v1(189.484,35.382) ; R2.2@185.481,33.401 186.607,33.401 187.198,33.992 v1(187.198,35.382)
RED0: J2_DG1.7 J2_DG2.7 J2_DG3.7 J2_DG4.7 J2_DG5.7 J2_DG6.7 J2_DG7.7 J2_DG8.7 U1.57 | length 419.7
  Top Layer w0.2: J2_DG8.7@17.907,2.286 19.66,0.533 32.36,0.533 32.766,0.94 54.661,0.94 J2_DG7.7@56.007,2.286 57.354,0.94 92.761,0.94 J2_DG6.7@94.107,2.286 95.428,0.965 100.254,0.965 100.686,0.533 130.311,0.533 131.572,1.794 131.572,2.286 J2_DG5.7@132.207,2.286 132.969,2.286 133.477,2.794 133.477,2.896 134.036,3.454 v1(135.535,3.454) ; v1(94.463,9.931) 95.733,11.201 104.166,11.201 104.767,11.802 v1(106.045,13.081) ; v1(137.948,17.602) 139.7,17.602 140.589,16.713 140.589,15.57 139.577,14.558 U1.57@139.577,11.273 ; v1(171.501,7.137) 174.93,7.137 175.972,6.096 246.279,6.096 v1(246.507,5.867) 250.14,5.867 250.698,6.426 295.021,6.426 296.114,5.334 296.114,1.27 295.555,0.711 289.433,0.711 288.087,2.057 288.087,2.946 287.808,3.226 285.547,3.226 J2_DG1.7@284.607,2.286 ; J2_DG3.7@208.407,2.286 210.643,0.051 245.542,0.051 246.507,1.016 J2_DG2.7@246.507,2.286
  Bottom Layer w0.2: J2_DG6.7@94.107,2.286 94.107,9.576 v1(94.463,9.931) ; v1(106.045,13.081) 113.386,20.422 129.54,20.422 132.741,17.221 137.567,17.221 v1(137.948,17.602) ; v1(135.535,3.454) 136.652,4.572 137.433,5.353 143.637,5.353 144.888,4.102 152.253,4.102 153.504,5.353 154.241,5.353 155.289,6.401 170.18,6.401 170.307,6.273 J2_DG4.7@170.307,2.286 ; 170.307,5.715 171.069,5.715 171.501,6.147 v1(171.501,7.137) ; J2_DG2.7@246.507,2.286 v1(246.507,5.867)
RED1: J2_DG1.8 J2_DG2.8 J2_DG3.8 J2_DG4.8 J2_DG5.8 J2_DG6.8 J2_DG7.8 J2_DG8.8 U1.59 | length 355.7
  Top Layer w0.2: v1(25.096,8.788) 25.553,8.331 96.978,8.331 97.232,8.585 109.22,8.585 v1(109.703,9.068) ; v1(63.246,7.976) 63.602,8.331 ; J2_DG5.8@134.747,2.286 135.814,2.286 137.16,0.94 161.417,0.94 161.748,1.27 161.748,2.743 162.23,3.226 166.37,3.226 166.828,2.769 166.828,1.499 167.386,0.94 171.501,0.94 J2_DG4.8@172.847,2.286 174.041,1.092 v1(176.073,1.092) ; U1.59@140.577,11.273 140.577,12.383 v1(140.894,12.7) ; J2_DG3.8@210.947,2.286 210.947,0.94 211.405,0.483 245.136,0.483 245.568,0.914 245.568,2.896 245.898,3.226 247.168,3.226 248.108,2.286 J2_DG2.8@249.047,2.286 249.047,1.27 250.241,0.076 284.938,0.076 J2_DG1.8@287.147,2.286
  Bottom Layer w0.2: J2_DG8.8@20.447,2.286 20.447,4.14 v1(25.096,8.788) ; J2_DG7.8@58.547,2.286 59.487,1.346 61.697,1.346 62.027,1.676 62.027,6.756 v1(63.246,7.976) ; J2_DG6.8@96.647,2.286 96.647,7.747 v1(97.486,8.585) ; J2_DG5.8@134.747,2.286 134.747,4.445 133.731,5.461 128.245,5.461 125.603,8.103 114.173,8.103 113.564,7.493 110.871,7.493 110.568,7.796 110.568,8.203 v1(109.703,9.068) 111.989,9.068 122.073,19.152 125.476,19.152 126.289,18.339 126.289,13.36 126.823,12.827 129.871,12.827 131.008,11.69 131.033,11.715 133.192,11.715 136.373,8.534 139.878,8.534 140.513,9.169 140.513,12.319 v1(140.894,12.7) ; v1(176.073,1.092) 176.632,0.533 198.4,0.533 199.39,1.524 199.39,2.591 200.025,3.226 210.008,3.226 J2_DG3.8@210.947,2.286
RED2: J2_DG1.9 J2_DG2.9 J2_DG3.9 J2_DG4.9 J2_DG5.9 J2_DG6.9 J2_DG7.9 J2_DG8.9 U1.60 | length 375.3
  Top Layer w0.2: v1(62.307,9.982) 62.307,9.804 62.586,9.525 63.602,9.525 63.958,9.169 96.139,9.169 97.765,10.795 100.915,10.795 ; J2_DG6.9@99.187,2.286 100.108,1.365 100.68,1.365 101.105,0.94 129.744,0.94 130.607,1.803 130.607,2.896 131.572,3.861 134.595,3.861 134.951,4.216 136.17,4.216 136.297,4.089 136.297,3.175 136.703,2.769 136.703,2.286 J2_DG5.9@137.287,2.286 ; v1(100.051,9.931) 100.915,10.795 ; U1.60@141.077,11.273 141.077,10.267 140.589,9.779 136.163,9.779 134.563,11.379 131.217,11.379 130.404,12.192 106.807,12.192 105.41,10.795 100.915,10.795 ; v1(143.002,3.962) 143.561,3.404 155.727,3.404 156.083,3.048 156.083,1.778 156.515,1.346 161.138,1.346 161.341,1.549 161.341,2.903 162.064,3.626 167.926,3.626 168.326,3.226 174.448,3.226 J2_DG4.9@175.387,2.286 ; v1(251.587,5.664) 294.894,5.664 295.707,4.851 295.707,1.524 295.529,1.346 290.627,1.346 J2_DG1.9@289.687,2.286
  Bottom Layer w0.2: J2_DG8.9@22.987,2.286 22.657,2.286 22.657,4.115 23.14,4.597 26.239,4.597 26.899,3.937 46.406,3.937 47.422,2.921 47.422,1.549 47.625,1.346 56.566,1.346 57.1,1.88 57.1,4.775 61.087,8.763 ; J2_DG7.9@61.087,2.286 61.087,8.763 ; v1(62.307,9.982) 61.087,8.763 ; J2_DG6.9@99.187,2.286 99.187,6.858 99.492,7.163 99.492,9.373 v1(100.051,9.931) ; J2_DG5.9@137.287,2.286 137.948,2.286 139.624,3.962 v1(143.002,3.962) ; J2_DG4.9@175.387,2.286 176.403,2.286 176.784,1.905 176.784,1.55 177.394,0.94 196.165,0.94 197.308,2.083 197.308,2.972 197.993,3.658 212.116,3.658 214.427,1.346 217.094,1.346 217.628,1.88 217.628,5.791 218.72,6.883 250.419,6.883 251.587,5.715 J2_DG2.9@251.587,2.286
RED3: J2_DG1.10 J2_DG2.10 J2_DG3.10 J2_DG4.10 J2_DG5.10 J2_DG6.10 J2_DG7.10 J2_DG8.10 U1.61 | length 339.2
  Top Layer w0.2: J2_DG8.10@25.527,2.286 26.467,1.346 31.212,1.346 31.547,1.681 31.547,2.54 32.639,3.632 62.281,3.632 J2_DG7.10@63.627,2.286 ; v1(73.229,3.556) 73.711,4.039 88.926,4.039 89.332,3.632 100.381,3.632 J2_DG6.10@101.727,2.286 ; v1(114.834,6.858) 117.069,9.093 130.709,9.093 v1(131.649,10.033) ; v1(141.351,9.296) 141.577,9.522 U1.61@141.577,11.273 ; v1(160.122,3.581) 160.566,4.026 169.368,4.026 169.761,3.632 176.581,3.632 J2_DG4.10@177.927,2.286
  Bottom Layer w0.2: J2_DG7.10@63.627,2.286 64.897,3.556 v1(73.229,3.556) ; J2_DG6.10@101.727,2.286 101.727,10.414 102.108,10.795 105.283,10.795 105.461,10.617 105.461,6.477 106.553,5.385 113.361,5.385 113.615,5.639 113.869,5.385 115.748,7.264 ; v1(114.834,6.858) 115.24,7.264 124.613,7.264 127.381,4.496 131.903,4.496 132.538,3.861 133.376,3.861 133.808,3.429 133.808,1.524 133.985,1.346 138.888,1.346 J2_DG5.10@139.827,2.286 140.767,1.346 158.318,1.346 159.131,2.159 159.131,2.851 159.258,2.978 159.518,2.978 v1(160.122,3.581) ; v1(131.649,10.033) 134.112,10.033 136.017,8.128 140.183,8.128 v1(141.351,9.296) ; J2_DG4.10@177.927,2.286 178.588,2.286 179.528,1.346 193.929,1.346 194.539,1.956 194.539,5.029 195.149,5.639 215.977,5.639 ; J2_DG3.10@216.027,2.286 216.027,6.223 217.094,7.29 252.984,7.29 254.127,6.147 J2_DG2.10@254.127,2.286 ; 254.127,3.226 256.921,6.02 289.459,6.02 292.227,3.251 J2_DG1.10@292.227,2.286
RED4: J2_DG1.11 J2_DG2.11 J2_DG3.11 J2_DG4.11 J2_DG5.11 J2_DG6.11 J2_DG7.11 J2_DG8.11 U1.63 | length 348.8
  Top Layer w0.2: J2_DG8.11@28.067,2.286 29.922,4.14 64.313,4.14 J2_DG7.11@66.167,2.286 68.453,4.572 89.18,4.572 89.535,4.216 100.635,4.216 100.889,3.962 101.677,3.962 103.353,2.286 J2_DG6.11@104.267,2.286 105.207,3.226 118.237,3.226 118.669,3.658 123.394,3.658 123.775,4.039 127.331,4.039 129.065,5.773 137.229,5.773 139.142,3.861 140.132,3.861 141.707,2.286 J2_DG5.11@142.367,2.286 ; v1(104.267,9.906) 108.191,9.906 109.664,11.379 128.423,11.379 v1(129.134,10.668) ; U1.63@142.577,11.273 142.577,10.16 143.136,9.601 v1(152.4,9.601) ; 158.471,4.42 158.477,4.426 170.333,4.426 170.72,4.039 178.715,4.039 J2_DG4.11@180.467,2.286 ; v1(190.399,3.912) 190.627,3.683 196.469,3.683 196.876,4.089 216.764,4.089 J2_DG3.11@218.567,2.286 220.32,4.039 241.097,4.039 241.554,4.496 254.458,4.496 J2_DG2.11@256.667,2.286 258.014,3.632 292.685,3.632 294.031,2.286 J2_DG1.11@294.767,2.286
  Bottom Layer w0.2: J2_DG6.11@104.267,2.286 v1(104.267,9.906) ; v1(129.134,10.668) 130.785,9.017 134.48,9.017 135.776,7.722 140.539,7.722 140.843,8.026 141.859,8.026 142.85,9.017 151.816,9.017 v1(152.4,9.601) ; J2_DG5.11@142.367,2.286 143.129,2.286 144.145,3.302 152.781,3.302 153.035,3.556 156.21,3.556 157.074,4.42 v1(157.988,4.42) ; J2_DG4.11@180.467,2.286 182.093,3.912 v1(190.399,3.912)
ROWA0: J1_DG1.4 U1.115 | length 145.6
  Top Layer w0.2: U1.115@165.227,18.423 166.303,18.423 168.961,21.082 v1(169.012,21.082) ; v1(177.902,28.016) 178.62,28.734 214.129,28.734 233.096,47.701 277.952,47.701 280.797,50.546 280.797,51.943 281.356,52.502 293.828,52.502 J1_DG1.4@294.767,51.562
  Bottom Layer w0.2: v1(169.012,21.082) 169.012,21.133 170.892,23.012 174.041,23.012 177.902,26.873 v1(177.902,28.016)
ROWA1: J1_DG1.5 U1.121 | length 144.8
  Top Layer w0.2: U1.121@165.227,21.423 168.25,21.423 172.696,25.869 174.943,25.869 175.159,25.654 179.922,25.654 180.989,26.721 191.32,26.721 191.853,26.187 253.315,26.187 269.698,42.57 291.262,42.57 292.227,43.536 J1_DG1.5@292.227,51.562
ROWA2: J1_DG1.6 U1.122 | length 141.3
  Top Layer w0.2: U1.122@165.227,21.923 168.075,21.923 172.421,26.269 175.54,26.269 175.749,26.06 179.522,26.06 180.589,27.127 240.284,27.127 256.21,43.053 288.621,43.053 289.687,44.12 J1_DG1.6@289.687,51.562
ROWA3: J1_DG1.7 U1.123 | length 138.3
  Top Layer w0.2: U1.123@165.227,22.423 167.437,22.423 171.684,26.67 175.736,26.67 175.94,26.466 179.121,26.466 180.189,27.534 233.851,27.534 249.93,43.612 286.182,43.612 287.147,44.577 J1_DG1.7@287.147,51.562
ROWA4: J1_DG1.8 U1.125 | length 132.3
  Top Layer w0.2: U1.125@165.227,23.423 167.818,23.423 171.471,27.076 176.353,27.076 176.563,26.866 178.715,26.866 179.783,27.934 229.458,27.934 245.796,44.272 279.095,44.272 284.607,49.784 J1_DG1.8@284.607,51.562
ROWA5: J1_DG1.9 U1.127 | length 129.3
  Top Layer w0.2: U1.127@165.227,24.423 168.225,24.423 171.284,27.483 176.517,27.483 176.734,27.266 178.258,27.266 179.325,28.334 229.096,28.334 245.822,45.06 277.343,45.06 282.067,49.784 J1_DG1.9@282.067,51.562
ROWA6: J1_DG1.10 U1.129 | length 125.1
  Top Layer w0.2: U1.129@165.227,25.423 168.654,25.423 171.146,27.915 175.819,27.915 177.039,29.134 205.207,29.134 224.181,48.108 276.073,48.108 J1_DG1.10@279.527,51.562